# Altium PCB mb997.PcbDoc (part 2 of 4)
Units mil, origin at the board's own origin, x right, y up, seen from the top; angles counter-clockwise.
Board outline 2598.43 x 3818.9 mil, 2 copper layers (Top, Bottom), stack 62.402 mil thick; 189 components, 183 nets, 746 pads, 491 vias.
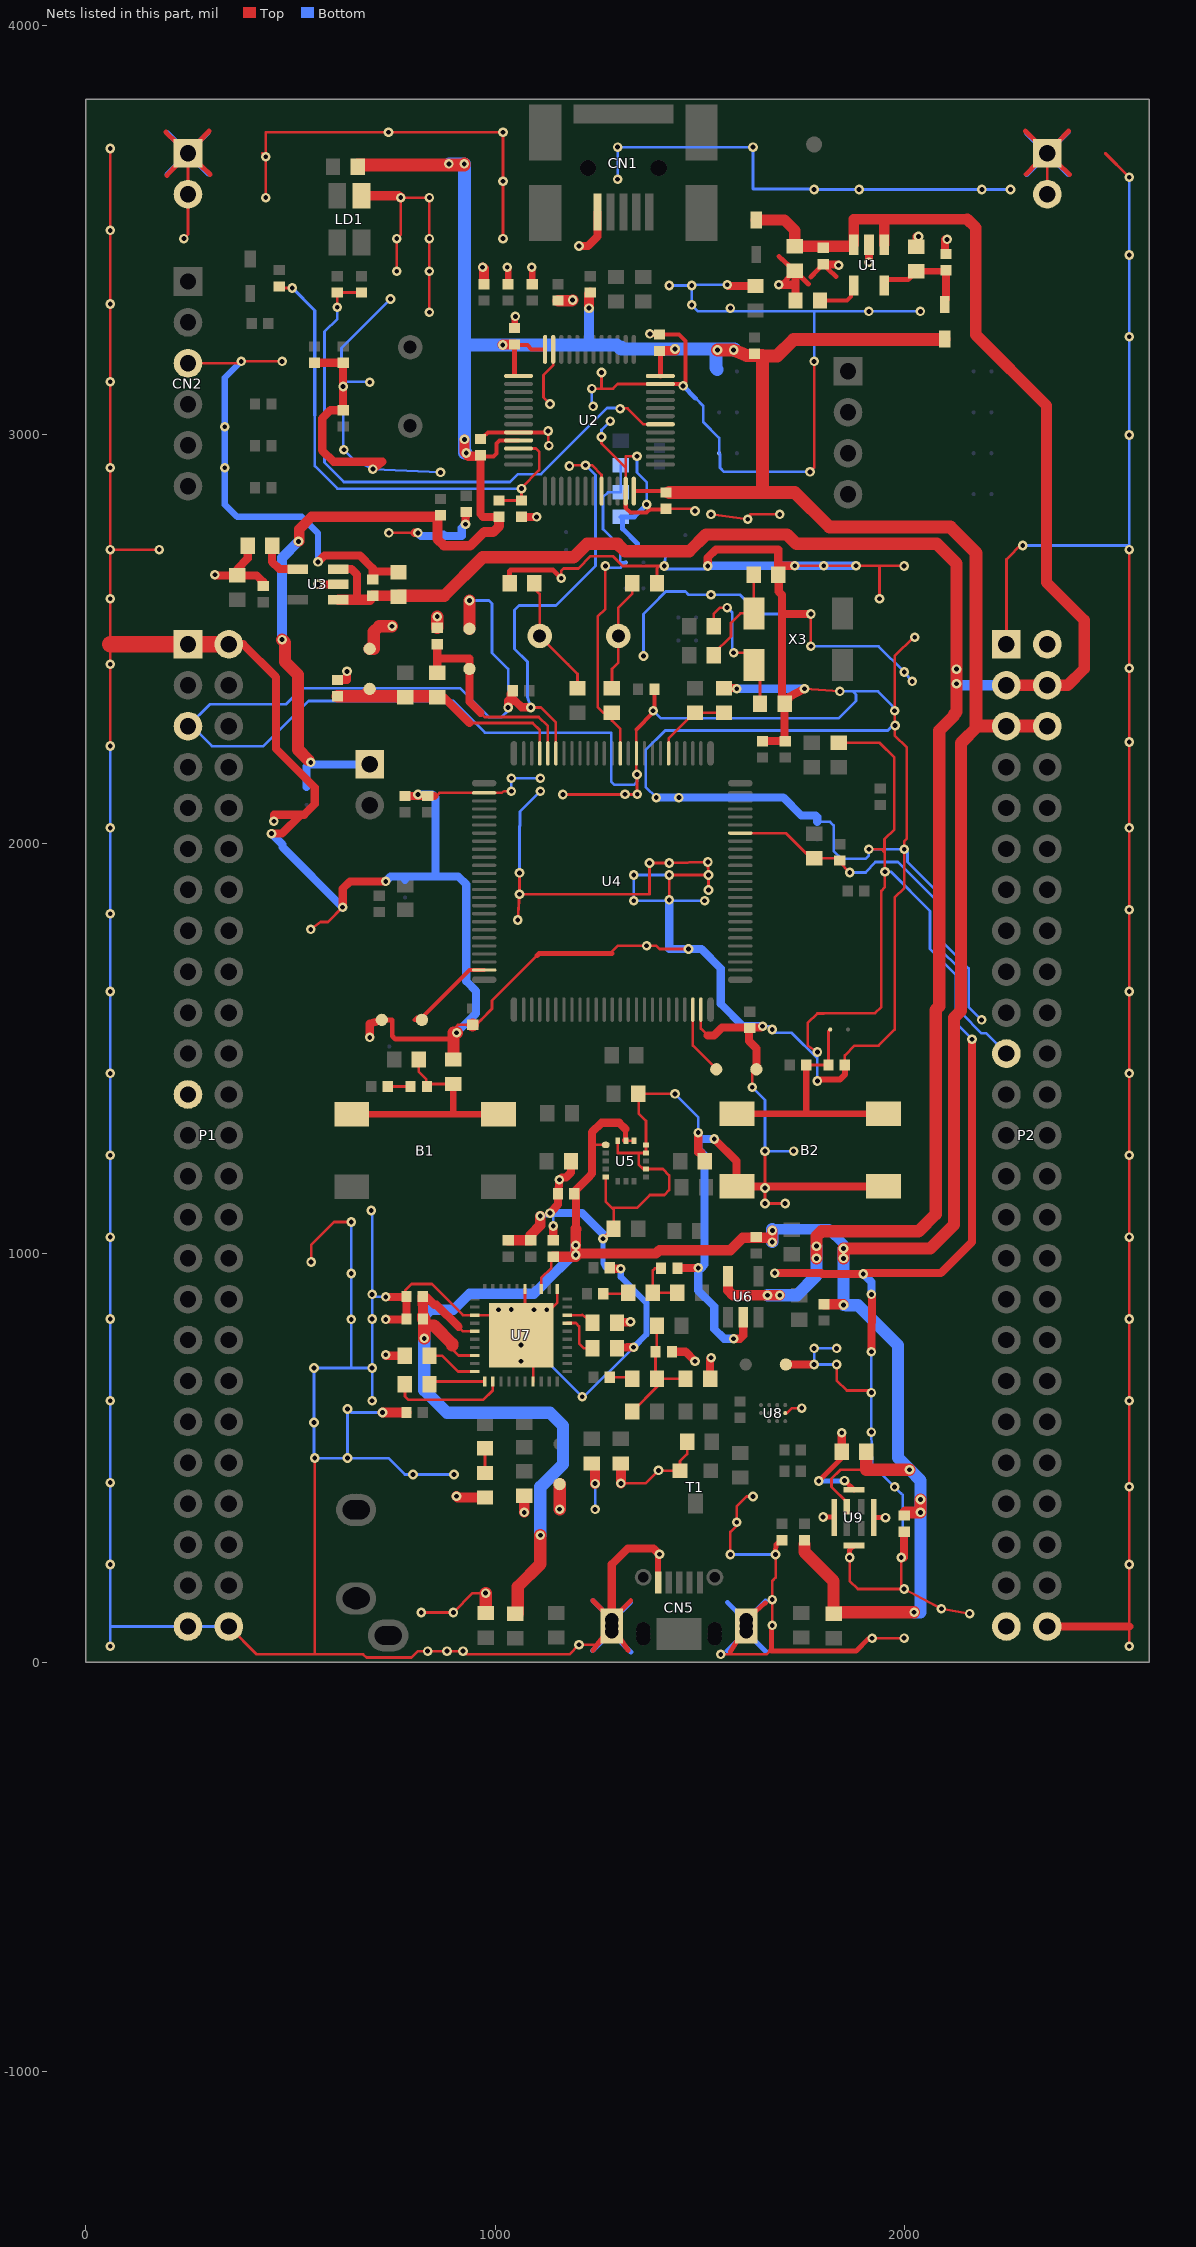
[diagram p2: the nets of this part, all layers, seen from the top]

## Via types
v1: diameter 23.62, hole 11.81, Top to Bottom, 484 vias
v2: diameter 19.68, hole 11.81, Top to Bottom, 7 vias

## Nets (pads, with @x,y where several pads share a name; then routed paths per layer and width w, separated by ;. In a path a pad name is that pad's centre, name@x,y a point inside that pad or via, vN(x,y) a via of type N, cw(c..) or ccw(c..) an arc to the next point about the centre after c; other vN are vias at no path point) (continued)
3V: C7.2 C8.2 C10.2 C12.1 C39.2 C42.2 C43.2 C45.2 C58.2 C60.2 D3.2 JP1.1 P2.5 P2.6 R1.2 R9.2 R14.2 R18.2 R19.1 R45.1 R51.1 R64.2 R66.2 R67.2 SB2.2 SB17.1 U2.1 U2.9 U2.24 U2.36 U2.48 U5.1 U5.14 U5.15 U7.5 U7.8 U7.33 U9.1 | length 13365.3
  Top w6.5: R1.2@663.82,3654.37 R1.2@663.82,3658.9 ; R18.2@858.9,2798.9 R18.2@859.08,2799.07 ; 895.17,773.9 895.17,764.69 910.17,749.69 U7.8@950.12,749.69 ; 910.25,819.94 921.45,808.74 U7.5@950.12,808.74 ; U2.1@1047.24,3147.3 1047.24,3144.93 1048.91,3143.27 U2.1@1057.11,3143.27 ; U7.33@1112.32,911.89 1112.32,938.9 1137.21,963.79 1137.21,990.79 1141.65,990.79 C42.2@1141.81,990.95 ; C39.2@1193.29,1144.74 1194.82,1144.74 1195.51,1145.43 C39.2@1196.2,1144.74 ; 1236.89,1264.17 U5.1@1270,1264.17 ; U5.15@1319.21,1274.02 U5.14@1338.9,1274.02 ; R14.2@1633.82,3197.36 1633.82,3196.98 1629.75,3192.91 R14.2@1637.62,3192.91 ; R64.2@1755.67,288.18 R64.2@1755.67,298.39 ; U9.1@1859,379.91 1859,391.42 1821.87,428.55 1821.87,448.54 1843.73,470.4 1906.71,470.4 ; C60.2@1999.21,358.9 2006.46,366.14 C60.2@2007.51,367.2
  Top w9.84: C10.2@963.81,2946.79 995.9,2946.79 1002.81,2953.7 1002.81,2977.99 1010.61,2985.79 U2.9@1057.11,2985.79 ; C7.2@1047.24,3220.16 1048.5,3218.9 1078.54,3218.9 1089.21,3208.23 U2.48@1122.07,3208.23 ; U2.24@1338.61,2861.77 1414.13,2861.77 C12.1@1417.32,2858.58
  Top w11.81: U2.1@1047.24,3147.3 C7.2@1047.24,3220.16 ; U5.15@1318.17,1275.06 1318.17,1303.15 ; C8.2@1403.26,3204.41 1403.57,3204.1 U2.36@1403.57,3143.26
  Top w15.75: U5.15@1318.17,1275.06 U5.15@1319.21,1274.02
  Top w20: C43.2@823.15,893.7 830.95,893.7 851.23,873.42 856.77,873.42 910.25,819.94 ; C10.2@963.81,2949.3 963.81,2946.79 963.81,2805.5 970.41,2798.9 R19.1@1002.81,2798.9 ; C39.2@1196.2,1144.73 C39.2@1197.76,1143.18 ; 1197.76,1058.17 C39.2@1197.76,1143.18 ; 1318.17,1303.15 1303.15,1318.17 1259.84,1318.17 1236.89,1295.22 1236.89,1264.17 1236.89,1194.11 1227.68,1184.9 1227.68,1184.35 1197.76,1154.43 C39.2@1197.76,1143.18
  Top w23.62: R18.2@858.9,2798.9 858.9,2744.09 874.65,2728.35 939.21,2728.35 972.83,2761.97 995.59,2761.97 1009.21,2775.59 R19.1@1009.21,2798.9 R19.1@1002.81,2798.9 ; R18.2@859.08,2799.07 R18.2@866.14,2802.83 ; v1(924.81,2988.19) 924.81,2956.54 934.57,2946.79 949.21,2946.79 ; C10.2@963.81,2946.79 949.21,2946.79 ; C10.2@963.81,2949.3 949.21,2946.79 ; v1(1229.21,3308.9) 1229.21,3343.94 R9.2@1232.24,3346.97 ; C8.2@1401.57,3204.41 1403.26,3204.41 1439.21,3204.41 v1(1439.21,3208.9) ; C12.1@1417.32,2858.58 C12.1@1425.2,2858.58
  Top w25: v1(519.21,2738.9) 521.18,2738.9 521.18,2768.9 551.18,2798.9 R18.2@858.9,2798.9 ; C43.2@823.15,893.7 C45.2@823.29,846.45 ; v1(1018.41,3218.9) 1018.41,3220.16 C7.2@1047.24,3220.16 ; C42.2@1141.81,990.95 1196.9,990.95 v1(1196.9,995.21) v1@1196.9,998.9 ; 1197.76,1058.17 1196.9,1059.02 v1(1196.9,1018.82) v1@1196.9,998.9 ; R45.1@1637.62,1038.82 R45.1@1637.62,1037.08 ; v1(1676.97,1026.69) v1@1676.97,1035.82 ; v1(1677.21,1054.9) 1677.21,1035.82 v1@1676.97,1035.82 ; R51.1@1803.21,874.9 1851.08,874.9 v1(1851.21,872.9) ; v1@1196.9,998.9 1393.21,998.9 1401.21,1006.9 1574.27,1006.9 1604.46,1037.08 R45.1@1637.62,1037.08 ; R45.1@1637.62,1037.08 1675.71,1037.08 v1@1676.97,1035.82
  Top w28: D3.2@2094.21,3232.28 2098.39,3232.28 D3.2@2098.39,3233.11
  Top w30: v1(479.21,2498.9) 486.21,2491.9 486.21,2444.9 518.02,2413.09 518.02,2230.03 v1@543.08,2204.97 ; C45.2@823.31,838.89 C45.2@824.01,839.6 ; C45.2@823.29,846.45 825.03,844.71 825.03,840.61 C45.2@824.01,839.6 ; v1(826.77,791.34) 826.77,822.83 ; 895.17,773.9 895.17,778.06 850.39,822.83 826.77,822.83 ; R66.2@1049.21,118.9 1055.12,118.9 1055.12,184.6 1110.33,239.81 v1(1110.33,310.52) ; R64.2@1755.67,288.18 1755.67,269.66 1826.77,198.56 1826.77,119.76 R67.2@1827.64,118.9 1830.79,122.05 v1(2023.62,122.05) ; v1(1851.21,986.9) v1(1851.21,1010.9) 2063.21,1010.9 2121.21,1068.9 2121.21,1574.9 2138.19,1591.88 2138.19,2246.42 2179.17,2287.4 ; C58.2@1906.71,514.12 1906.71,470.4 v1(2012.47,470.4) ; C60.2@2002.65,366.14 2006.46,366.14 v1(2039.37,366.14) v1(2039.37,397.64) ; 2175.21,2287.4 2179.17,2287.4 ; 2194.88,2287.4 2179.17,2287.4 ; C45.2@824.01,839.6 826.77,839.6 826.77,822.83
  Top w31.5: R1.2@663.82,3658.9 924.21,3658.9 v1(924.21,3661.4) ; C12.1@1425.2,2858.58 1653.54,2858.58 ; v1(1543.18,3206.68) v1(1582.53,3206.68) 1614.17,3192.91 R14.2@1629.75,3192.91 ; R14.2@1637.62,3192.91 1653.54,3192.91 1653.54,3192.28 ; D3.2@2094.21,3232.28 1729.21,3232.28 1689.21,3192.28 1653.54,3192.28 ; 2175.21,2287.4 2175.21,2710.87 2112.25,2773.83 1816.82,2773.83 1732.06,2858.58 1653.54,2858.58 ; 2194.88,2287.4 P2.5@2249.21,2287.4 P2.6@2349.21,2287.4 ; 1653.54,2858.58 1653.54,3192.28
  Bottom w6.5: v1@826.77,790.59 v1(826.77,791.34) v1@826.77,798.46 ; 1542.65,3158.92 SB2.2@1547.2,3154.37 ; v1(1851.21,872.9) 1856.53,872.9 v1@1857.21,872.22
  Bottom w19.68: SB17.1@539.21,2138.58 539.21,2188.9 v1@546.88,2196.56 ; v1(549.21,2198.9) v1@546.88,2196.56 ; JP1.1@693.22,2194.23 549.21,2194.23 v1@546.88,2196.56
  Bottom w23.62: 1229.21,3218.9 v1(1229.21,3308.9) ; 1314.81,3208.9 v1(1439.21,3208.9)
  Bottom w25: v1(479.21,2498.9) 479.21,2698.9 v1(519.21,2738.9) ; 826.77,822.07 826.77,845.44 842.75,861.42 898.08,861.42 937.19,900.53 1094.59,900.53 1118.2,924.38 1190.23,995.21 v1(1196.9,995.21) v1(1196.9,1018.82) ; v1@1676.97,1058.17 v1@1677.21,1058.17 ; v1(1851.21,1010.9) 1851.21,1022.17 1815.21,1058.17 v1@1680.48,1058.17 ; v1@1677.21,1058.17 v1@1680.48,1058.17 ; v1@1677.21,1058.17 v1(1677.21,1054.9) v1@1680.48,1058.17
  Bottom w30: v1@826.77,790.59 826.77,664.91 882.1,609.58 1133.94,609.58 1165.42,578.1 1165.42,483.66 1110.33,428.57 v1(1110.33,310.52) ; v1@826.77,798.46 826.77,822.07 ; v1(1676.97,1026.69) v1@1676.97,1058.17 ; v1(1851.21,872.9) v1(1851.21,986.9) v1(1851.21,1010.9) ; v1@1857.21,872.22 1886.53,872.22 1984.09,774.66 1984.09,499.59 2012.87,470.8 2039.37,444.31 v1(2039.37,397.64) v1(2039.37,366.14) 2039.37,122.05 v1(2023.62,122.05)
  Bottom w31.5: v1(886.71,3661.4) v1(924.21,3661.4) 924.81,3661.4 924.81,3218.9 ; v1(929.32,2954.84) 924.81,2954.84 v1(924.81,2988.19) 924.81,3218.9 ; 1314.81,3208.9 1314.58,3208.66 ; 1542.65,3158.92 1539.21,3162.36 v1@1539.21,3208.66 ; v1(1543.18,3206.68) v1@1541.2,3208.66 ; 924.81,3218.9 v1(1018.41,3218.9) 1229.21,3218.9 1297.01,3218.9 1302.01,3213.9 ; 1302.01,3213.9 1307.38,3213.9 1312.38,3208.9 1312.61,3208.66 ; 1302.01,3213.9 1307.01,3208.9 1307.25,3208.66 1312.61,3208.66 ; 1312.61,3208.66 1314.58,3208.66 ; 1314.58,3208.66 v1@1539.21,3208.66 ; v1@1539.21,3208.66 v1@1541.2,3208.66 ; v1@1541.2,3208.66 v1@1582.53,3208.66 ; v1@1582.53,3208.66 1584.52,3208.66 v1(1582.53,3206.68) v1@1582.53,3208.66
5V: C1.2 C2.2 C19.2 C20.2 D1.2 P2.3 P2.4 U1.1 U1.3 U3.1 U3.3 U6.5 | length 6369.8
  Top w6.5: C2.2@1801.71,3456.4 C2.2@1801.71,3459.96 ; 2153.21,3525.9 2153.6,3526.28
  Top w20: U3.3@616.93,2671.26 648.85,2671.26 662.21,2657.9 662.21,2596.46
  Top w25: U3.1@616.93,2596.46 662.21,2596.46 693.21,2596.46 693.21,2598.41 C19.2@700.79,2605.98 C20.2@761.65,2605.98 ; C20.2@763.78,2603.86 C20.2@761.65,2605.98 ; C20.2@765.21,2605.98 C20.2@761.65,2605.98 ; U6.5@1568.74,942.9 1568.74,908.9 1580.74,896.9 v1(1665.21,896.9) v1(1695.21,896.9) ; U1.3@1869.21,3459.96 1871.69,3459.96 U1.3@1875.95,3464.21 1875.95,3525.9 1950.75,3525.9 ; U1.1@1950.75,3464.21 1950.75,3525.9 ; 2153.21,3525.9 1950.75,3525.9
  Top w27.56: D1.2@1637.76,3524.45 1706.69,3524.45 1732.24,3498.9 C1.2@1732.24,3459.96 1801.71,3459.96 U1.3@1869.21,3459.96 ; 2153.6,3526.28 2174.21,3505.66 2174.21,3243.77 2347.08,3070.9 2347.08,2638.9 2439.21,2546.77 2439.21,2427.55 2399.07,2387.4 P2.4@2349.21,2387.4 P2.3@2249.21,2387.4
  Top w30: C20.2@765.21,2605.98 875.3,2605.98 969.21,2699.9 1191.21,2699.9 1224.21,2732.9 1299.21,2732.9 1317.21,2714.9 1474.13,2714.9 1515.21,2755.98 1713.21,2755.98 1736.3,2732.9 2079.21,2732.9 2127.21,2684.9 v1(2127.21,2426.9) v1(2127.21,2390.9) 2127.21,2322.34 2121.21,2316.34 2121.21,2312.9 2085.21,2276.9 2085.21,1602.9 2076.21,1593.9 2076.21,1094.9 2034.21,1052.9 1797.21,1052.9 1785.21,1040.9 v1(1785.21,1016.9) v1(1785.21,986.9)
  Bottom w25: v1(2127.21,2426.9) v1(2127.21,2390.9) 2133.21,2387.4 P2.3@2249.21,2387.4
  Bottom w30: v1(1665.21,896.9) v1(1695.21,896.9) 1737.21,896.9 1785.21,944.9 v1(1785.21,986.9) v1(1785.21,1016.9)
AIN_1: R2.2 R19.2 R20.2 U2.10 | length 1270.9
  Top w6.5: R19.2@1009.21,2838.9 R20.2@1064.09,2838.9 v1(1064.09,2867.9) 1064.09,2869.97 1107.21,2913.09 1107.21,2958.19 1099.3,2966.1 U2.10@1057.11,2966.1
  Top w7.87: R2.2@472.44,3361.89 476.06,3358.27 v1(503.94,3358.27) ; R20.2@1064.09,2838.9 R20.2@1070.87,2838.9
  Bottom w6.5: 559.06,3047.3 559.06,2923.36 614.51,2867.9 v1(1064.09,2867.9)
  Bottom w7.87: v1(503.94,3358.27) 559.06,3303.15 559.06,3047.3
BOOT0: P2.21 R30.2 R31.1 U4.94 | length 1029.1
  Top w6.5: U4.94@1598.96,2026.06 1709.93,2026.06 1771.29,1964.7 R30.2@1779.28,1964.7 1841.75,1964.7 1841.75,1958.89 R31.1@1842.24,1958.96 1842.24,1955.35 1840.76,1955.35 v1(1866.21,1929.9)
  Bottom w6.5: v1(1866.21,1929.9) 1905.2,1929.9 1928.81,1955.35 1983.9,1955.35 2078.34,1860.91 2078.34,1750.73 2141.3,1687.77 2141.3,1583.65 2187.62,1537.33 2199.28,1537.33 P2.21@2249.21,1487.4
GND: B2.1 B2.2 C1.1 C2.1 C3.2 C4.1 C5.1 C6.1 C7.1 C8.1 C9.1 C10.1 C11.1 C12.2 C13.1 C14.1 C15.1 C16.2 C17.2 C18.1 C19.1 C20.1 C21.1 C22.2 C23.2 C24.2 C25.1 C26.1 C27.2 C28.2 C29.1 C30.1 C31.1 C32.1 C33.2 C34.1 C35.2 C36.2 C37.1 C39.1 C40.1 C41.1 C42.1 C43.1 C45.1 C46.1 C47.2 C48.1 C49.2 C52.2 C53.1 C56.1 C57.1 C58.1 C59.2 C60.1 C61.2 CN1.5 CN2.3 CN5.0 CN5.5 JP2.1 JP2.2 JP3.1 JP3.2 LD1.1 LD2.2 LD3.2 LD4.2 LD5.2 LD6.2 P1.1 P1.2 P1.5 P1.23 P1.49 P1.50 P2.1 P2.2 P2.49 P2.50 R5.1 R6.1 R7.1 R8.2 R13.2 R20.1 R28.2 R39.1 R43.2 R44.2 R52.2 R57.1 R61.1 R62.1 R63.1 R65.2 SB6.2 SB10.1 SB18.1 SB19.1 T1.2 U1.2 U2.8 U2.20 U2.23 U2.35 U2.47 U3.2 U4.10 U4.20 U4.27 U4.74 U5.5 U5.10 U5.12 U5.13 U5.16 U6.2 U7.0 U7.3 U7.17 U7.31 U7.35 U8.D2 U9.5 | length 54564.7
  Top w6.5: v1(59.21,2238.9) v1(59.21,2438.9) 59.21,2487.4 v1(59.21,2598.9) v1(59.21,2718.9) ; v1(59.21,3698.9) v1(59.21,3498.9) v1(59.21,3318.9) v1(59.21,3128.9) v1(59.21,2918.9) v1(59.21,2718.9) ; v1(179.21,2718.9) v1(59.21,2718.9) ; v1(239.21,3478.9) 249.21,3488.9 JP2.2@249.21,3587.4 JP2.1@249.21,3687.4 ; CN2.3@249.21,3174.02 374.33,3174.02 v1(379.21,3178.9) v1(479.21,3178.9) ; P1.50@349.21,87.4 417.29,19.33 559.21,19.33 ; 430.71,3687.4 v1(439.21,3678.9) ; v1(439.21,3578.9) v1(439.21,3678.9) ; v1(549.21,1790.9) 573.21,1808.9 591.21,1808.9 v1(627.21,1844.9) ; v1(550.21,977.9) 550.21,1019.9 606.21,1075.9 v1(648.21,1075.9) ; v1(559.21,498.9) 559.21,19.33 ; v1(740.16,2759.84) v1@803.15,2759.84 ; v1(759.21,3398.9) v1(759.21,3478.9) 769.21,3488.9 v1(769.21,3578.9) v1(839.21,3578.9) v1(839.21,3478.9) v1(839.21,3398.9) v1(839.21,3298.9) ; C43.1@779.79,892.9 779.79,908.64 795.53,924.38 845.18,924.38 921.45,848.11 997.56,848.11 998.7,849.56 v1(1008.02,861.42) ; v1(819.14,121.64) v1(897.84,121.64) 945.06,168.86 v1(976.54,168.86) ; C32.1@834.88,2117.01 839.14,2112.75 846.76,2112.75 850.82,2116.81 856.28,2116.81 863.95,2124.48 1015.75,2124.48 1021.97,2128.78 1039.21,2128.78 v1(1039.5,2128.49) ; v1@897.84,1538.24 897.84,1546.22 909.21,1557.59 C34.1@945.06,1557.59 ; C34.1@944.36,1556.37 952.71,1556.37 965.24,1568.9 965.24,1569.83 992.28,1596.87 992.28,1616.94 1102.46,1727.12 ; C10.1@963.81,2989.3 966.06,2989.3 C10.1@970.65,2993.88 ; v1(1019.21,3478.9) v1(1019.21,3618.9) v1(1019.21,3738.9) v1(739.21,3738.9) 439.21,3738.9 v1(439.21,3678.9) ; v1(1055.24,1813.69) v1(1059.21,1876.65) ; v1(1059.21,1928.9) v1(1059.21,1876.65) ; v1(1062.99,775.59) 1062.99,735.62 v1(1063.11,735.5) ; U7.0@1063.11,798.9 1063.55,798.46 1069.03,798.46 1092.64,774.85 U7.17@1092.64,685.91 ; U7.35@1072.95,911.89 1072.95,861.42 v1(1094.59,861.42) ; v1(1086.72,2333.11) 1111.77,2333.11 1148.17,2296.71 U4.20@1148.17,2220.94 ; v1(1126.07,861.42) 1134.94,861.42 1134.94,861.84 1151.69,878.59 U7.31@1151.69,911.89 ; v1(1129.21,3008.9) 1129.21,2974.9 v1(1131.21,2972.9) ; v1(1133.86,3074.8) 1118.13,3090.53 1118.13,3145.67 1141.76,3169.29 U2.47@1141.76,3208.23 ; v1(1156.71,1178.9) v1@1157.55,1178.9 ; v1(1161.21,2648.9) 1161.21,2666.9 1167.21,2672.9 1203.21,2672.9 1233.21,2702.9 1287.21,2702.9 1311.21,2678.9 1401.21,2678.9 ; v1(1165.42,2120.62) v1@1317.21,2120.62 ; v1(1181.16,2923.36) 1183,2925.2 v1(1220.47,2925.2) 1236.24,2925.2 1259.87,2901.57 U2.20@1259.87,2861.77 ; v1(1236.25,3112.24) 1259.86,3112.24 ; v1(1259.86,2994.19) 1259.86,2978.45 1318.92,2919.39 ; v1(1259.86,3151.59) 1259.86,3112.24 ; U5.5@1270,1185.43 1270,1125.98 1285.75,1110.24 ; CN5.0@1284.84,74.62 1253.16,42.94 1249.31,42.94 v1(1204.77,42.94) 1181.16,19.33 929.32,19.33 v1(921.45,27.2) v1(882.1,27.2) v1(834.88,27.2) 811.27,27.2 795.53,11.46 685.35,11.46 677.48,19.33 559.21,19.33 ; 1285.2,1731.91 1285.2,1736.71 1299.21,1750.73 v1(1370.04,1750.73) 1393.65,1750.73 1401.52,1742.86 v1(1472.35,1742.86) ; LD6.2@1289.21,1058.9 1289.68,1059.37 1289.68,1106.3 1285.75,1110.24 ; U5.16@1299.53,1274.02 1299.53,1244.49 1350.39,1244.49 ; v1(1307.09,437.01) 1367.32,437.01 v1(1399.21,468.9) 1400.21,467.9 T1.2@1451.71,467.9 1451.71,491.4 1469.21,508.9 R57.1@1469.21,538.9 ; v1(1317.21,2120.9) v1@1317.21,2120.62 ; U2.23@1318.92,2861.77 1318.92,2919.39 ; 1345.02,2279.53 1345.02,2168.14 1345.16,2168 v1@1346.46,2166.7 ; v1(1346.46,2169.29) v1@1346.46,2166.7 ; v1(1346.43,2946.97) 1318.92,2946.97 1318.92,2919.39 ; v1(1347.21,2120.9) v1@1346.46,2120.62 ; C15.1@1395.21,2636.9 1395.21,2672.9 1401.21,2678.9 ; U2.35@1403.57,3123.58 1299.21,3123.58 1287.87,3112.24 1259.86,3112.24 ; v1(1413.21,2678.9) 1401.21,2678.9 ; C12.2@1417.32,2818.58 1478.92,2818.58 1483.39,2814.11 v1(1488.09,2813.18) ; v1(1425.21,1862.9) 1425.13,1862.98 v1(1425.13,1923.87) v1(1521.21,1923.87) ; v1(1439.21,1388.9) LD3.2@1349.21,1388.9 1350.39,1387.72 1350.39,1340.87 1368.43,1322.83 U5.13@1368.43,1264.17 U5.12@1368.43,1244.49 1350.39,1244.49 ; U4.74@1502.5,1594.96 1502.5,1548.57 1519.57,1531.5 ; v1(1521.21,1886.9) v1(1521.21,1923.87) ; v1(1527.21,2804.9) v1(1617.21,2792.9) 1623.03,2792.9 1623.03,2804.9 v1(1695.21,2804.9) ; v1(1551.05,19.33) 1662.92,19.33 1672.62,29.04 ; v1(1574.66,263.3) 1574.66,318.39 1590.4,334.13 v1(1590.4,342) 1590.4,381.35 1614.01,404.96 v1(1629.75,404.96) ; v1(1628.21,1404.9) 1628.21,1443.9 C36.2@1638.21,1453.9 ; v1(1659.21,1248.9) 1659.21,1162.71 v1(1659.21,1158.9) v1(1659.21,1121.13) v1(1708.45,1121.13) ; v1(1676.97,90.16) v1(1676.97,153.12) 1676.97,198.9 1685.29,207.21 v1@1685.29,272.1 ; U8.D2@1708.74,608.9 1713.21,608.9 1725.21,620.9 v1(1749.21,620.9) ; v1(1732.06,2679.39) v1(1802.89,2679.39) v1(1881.59,2679.39) 1939.21,2679.39 ; v1(1755.67,2378.9) v1(1842.24,2372.46) ; v1(1769.21,2908.9) 1779.21,2918.9 v1(1779.21,3178.9) ; v1(1771.41,2482.64) v1(1771.41,2561.34) ; v1(1787.15,1491.02) 1763.54,1506.76 1763.54,1561.85 1787.15,1585.46 1802.89,1585.46 1803.48,1586.04 1928.23,1586.04 1943.39,1601.2 1943.39,1885.1 1951.84,1893.55 v1@1951.84,1939.02 ; U9.5@1826.97,354.85 U9.5@1828.48,353.34 ; v1(1834.37,727.63) 1834.37,688.9 1859.21,664.06 1919.21,664.06 v1(1919.21,658.9) ; R28.2@1839.21,2246.9 1939.33,2246.9 1975.33,2210.9 1975.33,2035.14 1951.33,2011.14 1951.33,1978.88 ; C58.1@1846.71,499.1 C58.1@1846.71,514.12 ; v1(1853.55,443.85) v1@1854.11,443.85 ; C37.1@1854.37,1459.54 1854.37,1483.15 1877.98,1506.76 1936.68,1506.76 1976.03,1546.11 1976.03,1868.78 1999.64,1892.39 v1(1999.64,1986.83) 1999.64,2006.51 2006.03,2012.9 2006.03,2234.9 1976.03,2264.9 v1(1976.03,2325.24) 1976.03,2459.03 2023.25,2504.9 v1(2025.21,2504.9) ; v1(1866.14,255.91) 1866.14,198.9 1886.14,178.9 v1(1999.21,178.9) ; v1(1913.07,1986.83) 1943.39,1986.83 1951.33,1978.88 ; v1(1920.94,58.68) 1998.99,58.68 v1(1999.21,58.9) ; v1(1939.21,2598.9) 1939.21,2679.39 ; v1(1952.42,1931.74) v1@1951.84,1939.02 ; v1(1992.13,255.91) 1992.13,185.98 v1(1999.21,178.9) ; v1(1999.21,2678.9) 1998.72,2679.39 1939.21,2679.39 ; v1(2159.21,118.9) v1(2090.21,130.9) v1(1999.21,178.9) ; P2.1@2249.21,2487.4 2249.21,2695.13 2288.56,2734.48 2289.21,2733.83 v1(2289.21,2728.9) ; JP3.2@2349.21,3587.4 JP3.1@2349.21,3687.4 ; 2490.71,3687.4 v1(2549.21,3628.9) ; v1(2549.21,38.9) 2549.21,87.4 v1(2549.21,238.9) v1(2549.21,428.9) v1(2549.21,638.9) v1(2549.21,838.9) v1(2549.21,1038.9) v1(2549.21,1238.9) v1(2549.21,1438.9) v1(2549.21,1638.9) v1(2549.21,1838.9) v1(2549.21,2038.9) v1(2549.21,2248.9) v1(2549.21,2428.9) v1(2549.21,2718.9) ; v1(1059.21,1876.65) 1377.21,1876.65 v1(1377.21,1952.9) v1(1425.13,1952.9) v1(1519.57,1955.35) v1(1521.21,1923.87) ; 1285.75,1110.24 1346.46,1110.24 1377.95,1141.73 1413.39,1141.73 1425.2,1153.54 1425.2,1189.37 1409.45,1205.12 U5.10@1368.43,1205.12 1368.03,1204.72 1362.2,1204.72 1350.39,1216.54 1350.39,1244.49 ; v1@1317.21,2120.62 v1@1346.46,2120.62 ; v1@1346.46,2120.62 v1@1346.46,2166.7 ; 1951.33,1978.88 1951.84,1978.37 v1@1951.84,1939.02
  Top w9.84: C10.1@970.65,2993.88 982.24,3005.47 1125.79,3005.47 v1(1129.21,3008.9) ; C8.1@1401.57,3244.41 1449.21,3244.41 1464.72,3228.9 1464.72,3128.9 v1@1459.21,3123.39 ; U2.35@1403.57,3123.58 1403.76,3123.39 v1@1459.21,3123.39 ; v1(1459.21,3118.9) v1@1459.21,3123.39
  Top w10: U2.23@1318.92,2861.77 1318.92,2821.05 1330.69,2809.28 1370.04,2809.28 1377.91,2817.15 1415.89,2817.15 C12.2@1417.32,2818.58 ; 1345.02,2279.53 1385.78,2320.29 v1(1385.78,2325.24) 1389.21,2323.72 C24.2@1389.21,2374.02
  Top w12: C33.2@722.92,1569.72 748.31,1569.72 748.31,1530.37 756.18,1522.5 889.97,1522.5 897.84,1530.37 v1(905.71,1538.24) ; C14.1@1035.21,2636.9 1035.21,2666.9 1037.62,2669.31 1140.8,2669.31 v1(1161.21,2648.9) ; 1102.46,1727.12 1107.26,1731.91 1285.2,1731.91 ; v1(1263.21,1034.9) v1@1264.21,1033.9 ; LD6.2@1289.21,1058.9 v1@1264.21,1033.9 ; 1672.62,29.04 1675,27.2 ; v1(1676.97,90.16) 1675,88.19 1675,27.2 ; v1(1684.84,263.3) 1685.29,272.1 1686.03,286.85 1686.03,287.42 1699.77,301.16 R63.1@1700.58,298.39 ; v1(1790.55,442.94) 1846.71,499.1 C58.1@1846.71,514.12 ; v1(1801.37,354.85) U9.5@1826.97,354.85 ; v1@1854.11,443.85 U9.5@1876.71,421.25 ; v1(1866.14,255.91) 1866.14,274.85 U9.5@1876.71,285.43 ; v1(1920.94,58.68) 1913.07,58.68 1881.59,27.2 1675,27.2 ; U9.5@1924.94,353.34 v1(1953.66,353.34) ; v1@1264.21,1033.9 1263.21,1032.9 1265.21,1032.9 v1@1264.21,1033.9
  Top w12.01: 195.32,3739 JP2.1@249.21,3687.4 ; 197.61,3633.51 JP2.1@249.21,3687.4 ; 300.81,3741.29 JP2.1@249.21,3687.4 ; 303.1,3635.8 JP2.1@249.21,3687.4 ; 1238.39,28.9 1249.31,42.94 1278.07,79.89 CN5.0@1284.84,88.6 1291.32,78.98 1325,29 ; 1238.39,150.79 CN5.0@1284.84,103.76 1331.29,150.52 ; 1574.64,26.4 1607.29,78.55 CN5.0@1613.58,88.6 ; CN5.0@1613.58,103.76 1660.03,145.2 ; 1693.35,3435.66 C1.1@1732.24,3399.96 1720.07,3387.46 v1@1701.67,3368.57 ; C1.1@1733.74,3398.46 1746.24,3386.29 1765.13,3367.89 ; 1771.13,3385.01 1789.54,3403.9 C2.1@1801.71,3416.4 1814.21,3404.22 1833.1,3385.82 ; 2295.11,3741.6 2349,3690 2347.8,3688.75 2297.4,3636.11 ; 2400.81,3741.29 JP3.1@2349.21,3687.4 2403.1,3635.8
  Top w15: CN5.5@1398.03,194.9 1398.03,260.24 v1(1401.57,263.78) ; v1(1787.15,1420.19) 1790.76,1423.8 1842.24,1423.8 1854.37,1435.93 C37.1@1854.37,1459.54
  Top w15.75: v1(1029.21,3408.9) 1031.46,3406.65 R6.1@1031.46,3367.28 ; C7.1@1047.24,3260.16 1047.24,3286.93 v1(1049.21,3288.9) ; v1(1089.21,3408.9) 1090.51,3407.6 R7.1@1090.51,3367.28 ; v1(1377.91,3246.03) 1393.65,3244.41 C8.1@1401.57,3244.41
  Top w19.68: R20.1@1064.09,2798.9 v1(1101.21,2798.9) ; v1(1535.31,1278.53) 1589.21,1224.63 1589.21,1164.03 B2.2@1590.53,1162.71 1659.21,1162.71 B2.1@1948.8,1162.71 ; v1(1919.21,758.9) 1920.94,897.17 v1(1919.21,898.9)
  Top w20: v1(314.96,2657.48) 316.46,2655.98 C17.2@370.08,2655.98 ; P1.2@349.21,2487.4 384.35,2487.4 464.57,2407.18 464.57,2232.28 559.06,2137.8 559.06,2096.9 533.13,2070.98 525.21,2070.98 ; C13.1@395.2,2728.35 395.2,2696.85 370.08,2671.73 C17.2@370.08,2655.98 ; C18.1@433.07,2630.24 433.07,2640.24 417.32,2655.98 C17.2@370.08,2655.98 ; v1(453.21,2024.9) 479.13,2024.9 525.21,2070.98 ; v1(459.21,2054.9) 459.21,2070.98 525.21,2070.98 ; R13.2@558.21,3175.5 C6.1@628.41,3175.5 v1(628.41,3117.5) C9.1@628.41,3059.5 597.21,3059.5 577.21,3039.5 577.21,2961.5 605.01,2933.7 724.7,2933.7 v1(701.09,2915.49) ; v1(566.93,2633.86) U3.2@616.93,2633.86 ; v1(566.93,2688.98) 582.68,2704.72 669.29,2704.72 700.79,2673.23 700.79,2665.35 ; C25.1@614.52,2400.33 637.8,2400.33 v1(637.8,2421.26) ; v1(627.21,1844.9) 627.21,1890.13 645.21,1908.13 v1(732.57,1908.13) ; v1(693.21,1526.9) 693.21,1560.07 C33.2@722.92,1569.72 ; C19.1@700.79,2645.98 700.79,2665.35 ; v1(732.57,751.24) 732.57,748.9 C47.2@779.21,748.9 ; v1(732.57,837.81) 783.31,837.81 C45.1@783.31,838.89 783.31,893.54 C43.1@783.15,893.7 783.15,892.9 779.79,892.9 v1(732.57,892.9) ; C20.1@763.78,2663.86 762.28,2665.35 700.79,2665.35 ; C31.1@779.79,2117.01 v1@811.27,2117.01 ; v1@803.15,2759.84 803.27,2759.72 811.14,2759.72 v1(811.02,2759.84) ; v1(811.27,2120.62) v1@811.27,2117.01 ; 850.82,2116.81 850.62,2117.01 C32.1@834.88,2117.01 v1@811.27,2117.01 ; v1(927.21,2780.9) 927.21,2790.94 C11.1@929.13,2810.71 ; v1(1031.63,2333.11) 1031.63,2349.61 1048.14,2349.61 ; C26.1@1042.99,2374.02 1037.29,2366.21 1037.29,2360.47 1048.14,2349.61 ; v1(1086.72,2333.11) 1085.96,2333.87 1063.88,2333.87 1048.14,2349.61 ; v1(1133.94,1097.52) 1144.77,1108.34 1144.77,1110.18 1153.29,1118.7 C39.1@1153.29,1144.74 1157.54,1178.79 v1@1157.55,1178.9 ; C42.1@1141.81,1030.95 v1(1141.81,1066.04) ; v1(1156.71,1178.9) 1162.71,1184.9 1173.21,1184.9 1185.21,1196.9 LD4.2@1185.21,1223.9 ; v1(1204.72,3460.63) 1226.61,3460.63 1250.23,3484.25 CN1.5@1250.23,3543.35 ; R43.2@1279.86,963.73 1279.86,961.4 v1(1306.71,961.4) ; CN5.0@1284.84,88.6 CN5.0@1284.84,103.76 1284.84,239.3 1323.84,278.3 1387.06,278.3 v1(1401.57,263.78) ; C48.1@1297.73,766.98 1322.61,769.7 v1(1338.21,769.7) ; C46.1@1297.73,829.94 1314.4,831.04 1329.21,831.04 v1(1330.41,832.1) ; C24.2@1389.21,2374.02 C24.2@1389.21,2377.9 ; R52.2@1431.71,758.9 1464.69,758.9 v1(1488.09,735.5) ; R44.2@1445.2,962.6 1445.2,963.73 v1(1495.96,963.73) ; v1(1495.96,1294.27) 1495.96,1245.49 1503.83,1245.49 LD5.2@1512.21,1223.9 ; v1(1519.21,2678.9) 1519.21,2698.9 1539.21,2718.9 1691.42,2718.9 1691.42,2679.39 ; 1519.57,1531.5 1534.84,1531.5 1554.24,1550.9 C35.2@1620.21,1550.9 ; C52.2@1525.2,692.6 1525.2,741.73 v1(1527.56,744.09) ; C28.2@1559.06,2380.39 1588.72,2380.39 v1(1590.21,2378.9) ; v1(1566.93,3366.14) 1569.9,3363.17 LD2.2@1636.12,3363.17 ; v1(1582.53,790.59) 1598.27,790.59 1606.14,798.46 U6.2@1606.14,842.9 ; C35.2@1621.88,1549.72 1622.15,1549.45 1622.07,1549.72 1622.05,1549.77 C35.2@1621.71,1550.9 ; C36.2@1638.21,1448.9 1638.21,1453.9 1638.21,1499.9 1620.21,1517.9 C35.2@1620.21,1550.9 ; v1@1650.21,1550.9 C35.2@1621.71,1550.9 ; v1@1650.25,1550.86 v1(1653.36,1553.98) ; C29.1@1653.36,2250.8 C30.1@1708.45,2250.8 1706.64,2263.17 1706.64,2327.25 1700.79,2333.11 C27.2@1700.79,2336.14 ; v1(1683.21,950.9) 1797.21,950.9 1799.21,948.9 v1(1899.21,948.9) 1899.21,950.9 2088.91,950.9 2164.91,1026.9 v1(2164.91,1522.5) ; v1(1692.91,3366.14) 1733.74,3366.14 ; C49.2@1710.23,727.63 v1(1779.28,727.63) ; v1(1732.06,2679.39) 1691.42,2679.39 ; C1.1@1732.24,3399.96 1733.74,3398.46 1733.74,3366.14 ; C5.1@1733.74,3327.6 1733.74,3366.14 ; v1(1755.67,2378.9) 1716.54,2358.27 1716.54,2351.89 C27.2@1707.17,2342.52 C27.2@1700.79,2336.14 ; v1(1771.41,2561.34) 1700.79,2561.34 ; C2.1@1801.71,3416.4 1816.31,3415.42 1837.69,3415.42 v1(1839.21,3413.9) ; C58.1@1846.87,514.12 v1(1846.87,560.9) ; U1.2@1913.35,3464.21 1913.35,3421.3 v1(1913.39,3421.26) ; v1(1992.13,255.91) 1999.21,255.91 C60.1@1999.21,318.9 ; C3.2@2029.21,3458.9 2029.21,3483.9 v1(2034.21,3483.9) ; C4.1@2101.71,3441.4 2101.6,3443.93 2099.21,3446.31 2099.21,3476.9 v1(2104.21,3476.9) ; P2.50@2349.21,87.4 2549.21,87.4 ; C35.2@1620.21,1550.9 C35.2@1621.71,1550.9 ; 1691.42,2679.39 C16.2@1691.42,2657.48 1692.71,2656.19 1692.71,2616.43 1700.79,2608.35 1700.79,2561.34 ; C27.2@1700.79,2336.14 1700.79,2561.34
  Top w23.62: LD1.1@673.19,3583.5 764.61,3583.5 v1(769.21,3578.9) ; v1(969.21,3408.9) 972.4,3405.71 R5.1@972.4,3367.28
  Top w25: v1(724.41,610.24) C53.1@783.15,610.24 ; v1(905.51,405.51) 908.43,402.6 R61.1@975.2,402.6 ; C40.1@1031.63,1030.95 C41.1@1086.72,1030.95 1086.72,1044.05 1110.24,1067.56 v1(1110.24,1090.55) ; v1(1070.87,366.14) R62.1@1070.87,407.01 ; C56.1@1236.22,485.75 1244.12,485.75 v1(1244.12,436.44) ; v1(1307.09,437.01) C57.1@1307.09,485.75
  Top w27.56: R8.2@1153.5,3327.28 1187.6,3327.28 v1(1189.21,3328.9)
  Top w30: C22.2@693.22,2476.55 703.4,2476.55 703.4,2518.36 716.54,2531.5 v1(748.03,2531.5) ; C21.1@858.27,2527.87 v1(858.27,2555.12) ; R39.1@897.21,1472.9 897.21,1478.27 897.84,1478.9 897.84,1530.37 897.84,1538.24 v1(905.71,1538.24) ; C23.2@937.01,2525.38 v1(937.01,2594.49) ; C34.1@944.36,1556.37 C34.1@945.06,1557.59 ; R65.2@976.54,120.16 v1(976.54,168.86) ; v1(1157.48,374.02) C59.2@1157.48,435.25
  Top w40: 59.21,2487.4 P1.1@249.21,2487.4 P1.2@349.21,2487.4
  Bottom w6.5: v1(59.21,38.9) 59.21,87.4 ; v1(59.21,2238.9) v1(59.21,2038.9) v1(59.21,1828.9) v1(59.21,1638.9) v1(59.21,1438.9) v1(59.21,1238.9) v1(59.21,1038.9) v1(59.21,838.9) v1(59.21,638.9) v1(59.21,438.9) v1(59.21,238.9) 59.21,87.4 ; P1.50@349.21,87.4 P1.49@249.21,87.4 59.21,87.4 ; v1(648.21,1075.9) v1(648.21,949.9) v1(648.21,837.9) 648.21,718.9 ; v1(693.22,3127.98) 692.3,3128.9 624.21,3128.9 ; v1(697.21,1103.9) 699.21,1101.9 v1(699.21,898.9) ; v1(699.21,638.9) v1(699.21,718.9) ; v1(724.41,610.24) 647.87,610.24 v1(639.21,618.9) v1(639.21,498.9) ; v1(732.57,892.9) 705.21,892.9 v1(699.21,898.9) ; v1(744.21,3331.4) 624.21,3211.4 624.21,3128.9 ; v1(866.36,2907.62) v1(701.09,2915.49) 653.87,2939.1 v1(630.26,2962.71) 628.41,2964.56 v1(628.41,3117.5) 632.01,3121.1 624.21,3128.9 ; v1(899.21,458.9) v1(799.21,458.9) 779.21,458.9 739.21,498.9 v1(639.21,498.9) ; v1(937.01,2594.49) 984.25,2594.49 992.13,2586.61 992.13,2466.76 1031.5,2427.39 v1@1031.5,2340.98 ; v1(1031.63,2333.11) v1@1031.5,2340.98 ; v1(1039.37,862.2) 1039.37,852.2 1062.67,828.9 1062.67,798.9 v1(1212.64,648.93) 1217.44,648.93 v1(1338.21,769.7) ; v1(1039.5,2128.49) v1(1039.5,2159.97) v1(1110.33,2159.97) ; v1(1059.21,1928.9) 1059.21,2042.9 1060.74,2044.43 1060.74,2078.9 v1(1110.33,2128.49) ; v1(1086.72,2333.11) 1078.85,2358.27 1078.85,2444.84 1047.24,2476.45 1047.24,2570.87 1058.49,2582.12 1148.21,2582.12 1245.21,2679.12 1245.21,2901.16 1221.17,2925.2 v1(1220.47,2925.2) ; v1(1110.24,1090.55) 1126.98,1090.55 v1(1133.94,1097.52) ; v1(1141.81,1066.04) v1@1141.81,1097.52 ; v1(1236.25,3112.24) 1236.25,3071.86 v1(1239.21,3068.9) ; v1(1244.12,373.48) v1(1244.12,436.44) ; v1(1259.86,2994.19) 1259.86,3011.55 v1(1281.21,3032.9) ; v1(1299.21,3623.79) v1(1299.21,3702.49) v1(1629.75,3702.49) 1629.75,3600.18 1777.93,3600.18 v1(1779.21,3598.9) v1(1889.21,3598.9) v1(2189.21,3598.9) v1(2259.21,3598.9) ; v1(1346.46,2169.29) 1346.46,2152.1 1338.59,2144.23 1291.33,2144.23 1283.46,2152.1 1283.46,2271.65 975.04,2271.65 897.84,2348.85 543.69,2348.85 433.51,2238.67 307.59,2238.67 258.86,2287.4 P1.5@249.21,2287.4 302.79,2340.98 488.6,2340.98 527.95,2380.33 913.58,2380.33 984.41,2309.5 1015.89,2309.5 1031.5,2325.1 v1@1031.5,2340.98 ; v1(1346.43,2946.97) 1346.43,2907.23 1370.04,2883.62 v1(1370.04,2828.92) 1361.61,2820.48 ; 1347.61,2733.3 1354.3,2726.61 1401.52,2726.61 1417.26,2710.87 v1(1413.21,2678.9) 1419.21,2672.9 1419.21,2671.52 1511.83,2671.52 v1(1519.21,2678.9) v1@1519.57,2679.26 ; v1(1362.17,2459.03) 1362.17,2561.34 1401.52,2600.69 1401.52,2601.22 1416.73,2616.43 1464.48,2616.43 1472.35,2608.56 v1(1527.44,2608.56) 1598.27,2608.56 1645.49,2561.34 v1(1771.41,2561.34) ; v1(1385.78,2325.24) 1404.12,2306.9 1839.64,2306.9 1881.59,2348.85 1881.59,2364.59 1873.72,2372.46 ; v1(1393.65,2112.75) 1367.5,2138.9 1367.5,2228.9 1415.5,2276.9 1959.21,2276.9 1971.21,2288.9 v1(1977.21,2288.9) ; v1(1425.13,1923.87) v1(1338.56,1923.87) v1(1338.56,1860.91) 1425.21,1860.91 v1(1511.7,1860.91) ; v1(1425.13,3364.08) v1(1480.22,3364.08) ; v1(1439.21,1388.9) 1495.96,1332.15 v1(1495.96,1294.27) v1@1495.96,1292.52 ; 1489.3,3088.81 1508.36,3069.75 1508.36,3030.54 1547.2,2991.7 SB6.2@1547.2,2954.37 1549.21,2952.36 1549.21,2918.9 1559.21,2908.9 v1(1769.21,2908.9) ; v1(1566.93,3366.14) 1482.29,3366.14 v1(1480.22,3364.08) ; v1(1574.66,263.3) v1(1684.84,263.3) ; v1(1574.66,3308.99) v1@1574.66,3301.12 ; v1(1628.21,1404.9) 1659.21,1373.9 v1(1659.21,1248.9) v1(1729.21,1248.9) ; v1(1653.36,1553.98) 1669.1,1553.98 v1(1676.97,1546.11) 1676.97,1538.24 1724.19,1538.24 1787.15,1475.28 ; v1(1771.41,2482.64) 1936.68,2482.64 v1(1999.64,2419.68) v1(2019.21,2396.9) ; v1(1779.21,3178.9) 1779.21,3301.12 ; v1(1787.15,1420.19) 1787.15,1475.28 ; v1(1787.15,1491.02) 1787.15,1475.28 ; SB18.1@1787.15,2053.73 1818.63,2053.73 1827.21,2045.15 1827.21,1982.9 1846.89,1963.22 1905.2,1963.22 1913.07,1971.09 v1(1913.07,1986.83) v1(1999.64,1986.83) 2007.51,1978.96 2007.51,1955.35 2094.08,1868.78 2094.08,1758.6 2157.04,1695.64 2157.04,1601.2 v1(2188.52,1569.72) ; v1(1834.37,727.63) v1(1779.28,727.63) v1(1779.28,766.98) v1(1834.37,766.98) ; v1(1842.24,2372.46) 1873.72,2372.46 ; v1@1852.64,442.94 v1(1853.55,443.85) ; v1(1919.21,758.9) v1(1919.21,658.9) v1(1919.21,562.36) 1920.94,483.66 v1(1976.03,428.57) 1992.13,412.47 1996.21,408.39 1996.21,264.62 1992.13,260.54 v1(1992.13,255.91) ; v1(1952.42,1931.74) 1966.55,1931.74 2062.6,1835.69 2062.6,1742.86 2125.56,1679.9 2125.56,1561.85 v1(2164.91,1522.5) ; v1(1976.03,2325.24) 1972,2329.27 1972,2335.67 1935.21,2372.46 1873.72,2372.46 ; v1(2038.99,3301.12) v1(1913.07,3301.12) 1779.21,3301.12 ; v1(2289.21,2728.9) v1@2549.21,2728.9 ; v1(2549.21,2718.9) v1@2549.21,2728.9 ; v1(2549.21,3628.9) v1(2549.21,3438.9) v1(2549.21,3238.9) v1(2549.21,2998.9) v1@2549.21,2728.9 ; v1(639.21,498.9) v1(559.21,498.9) 557.21,500.9 v1(557.21,585.9) v1(557.21,718.9) 648.21,718.9 ; 648.21,718.9 v1(699.21,718.9) ; v1(699.21,718.9) v1(699.21,838.9) v1(699.21,898.9) ; v1(1480.22,3364.08) v1(1480.22,3316.86) 1495.96,3301.12 v1@1574.66,3301.12 ; v1@1574.66,3301.12 1779.21,3301.12
  Bottom w11.81: v1(1459.21,3118.9) 1489.3,3088.81
  Bottom w12: v1(1263.21,1034.9) 1263.21,974.9 1269.21,962.9 v1@1305.21,962.9 ; C61.2@1307.08,2798.92 C61.2@1311.21,2798.92 ; 1347.61,2733.3 1311.21,2769.7 C61.2@1311.21,2798.92 ; 1361.61,2820.48 1340.04,2798.92 C61.2@1311.21,2798.92 ; v1(1790.55,442.94) v1@1852.64,442.94
  Bottom w12.01: 197.4,3635.79 JP2.1@248,3687 ; 198,3738 JP2.1@248.8,3687.81 ; JP2.1@249.21,3687.4 JP2.1@248.8,3687.81 ; 298.6,3738.21 JP2.1@248.8,3687.81 ; 299.21,3636.4 248.41,3686.59 JP2.1@248,3687 ; 1237.81,28.17 CN5.0@1284.84,74.62 ; 1238.39,150.79 CN5.0@1284.84,103.76 ; CN5.0@1285,72 1331.45,24.97 ; CN5.0@1286,103 1331.29,146.68 ; 1566.55,28.17 CN5.0@1613.58,74.62 1660.03,27.58 ; 1567.13,146.68 1611.53,101.73 CN5.0@1613.58,99.64 ; CN5.0@1613.58,103.76 1660.62,150.21 ; 2297.79,3736.6 2348.41,3686.59 JP3.1@2349,3686 ; 2298.4,3634.79 JP3.1@2349,3686 ; JP3.1@2349.21,3687.4 2399.81,3738.61 ; 2400.21,3635.4 JP3.1@2349,3686 ; JP2.1@248,3687 JP2.1@248.8,3687.81
  Bottom w15: v1@1305.21,962.9 v1(1306.71,961.4) 1306.71,941.6 1369.41,878.9 1369.41,800.9 v1(1338.21,769.7)
  Bottom w15.75: v1(379.21,3178.9) 339.21,3138.9 v1(339.21,3018.9) v1(339.21,2918.9) 339.21,2828.9 369.21,2798.9 526.93,2798.9 566.93,2758.9 v1(566.93,2688.98)
  Bottom w19.68: v1(811.02,2759.84) 818.9,2751.97 874.02,2751.97 918.21,2751.97 918.21,2771.9 v1(927.21,2780.9) ; v1(1899.21,948.9) 1919.21,928.9 v1(1919.21,898.9)
  Bottom w20: v1(453.21,2024.9) 480.21,1997.9 480.21,1991.9 v1(627.21,1844.9) ; v1(732.57,1908.13) 744.38,1919.93 779.79,1919.93 ; SB19.1@779.79,1912.07 779.79,1919.93 ; v1(811.27,2120.62) 846.24,2120.62 854.11,2112.75 854.11,1919.93 ; SB10.1@874.02,2751.97 SB10.1@874.02,2755.91 ; v1(905.71,1538.24) 952.93,1585.46 952.93,1640.55 929.32,1664.16 929.32,1900.26 909.65,1919.93 854.11,1919.93 ; v1(1133.94,1097.52) 1141.81,1097.52 1212.59,1097.52 1263.21,1046.9 v1(1263.21,1034.9) ; v1(1393.65,2112.75) v1(1448.74,2112.75) 1703.94,2112.75 1747.8,2068.88 1783.19,2068.88 1786.72,2065.35 SB18.1@1787.15,2053.73 ; v1(1425.21,1862.9) 1425.21,1860.91 1425.21,1742.86 v1(1472.35,1742.86) 1503.83,1742.86 1551.05,1695.64 1551.05,1609.07 1606.14,1553.98 v1(1653.36,1553.98) ; v1@1495.96,1292.52 1495.96,1278.53 ; v1@1519.57,2679.26 1519.7,2679.39 v1(1732.06,2679.39) v1(1802.89,2679.39) v1(1881.59,2679.39) ; v1(1535.31,1278.53) 1495.96,1278.53 ; v1(1582.53,790.59) 1558.92,790.59 1535.31,814.2 1535.31,869.29 1495.96,908.64 1495.96,955.86 1503.83,963.73 1511.7,971.6 1511.7,1238.9 1495.96,1254.64 1495.96,1278.53 ; v1(1590.21,2378.9) v1(1755.67,2378.9) ; 779.79,1919.93 854.11,1919.93
LED_STLINK: R3.1 R4.1 U2.30 | length 1421.8
  Top w6.5: R4.1@673.19,3346.97 R3.1@614.13,3346.97 v1(614.17,3311.02) ; v1(1305.21,3062.9) 1306.43,3064.12 1323.21,3064.12 1362.17,3025.16 U2.30@1403.57,3025.16 ; v1(614.17,3311.02) v1(614.17,3311.02)
  Bottom w6.5: v1(614.17,3311.02) 614.17,3282.93 582.68,3251.44 582.68,2931.59 630.26,2884.01 1035.9,2884.01 1055.24,2903.35 1112.01,2903.35 1273.68,3065.02 1305.21,3065.02 v1(1305.21,3062.9)
MCO: C61.1 R25.1 R68.2 SB13.1 U4.12 | length 863.3
  Top w6.5: v1(1269.21,2678.9) 1269.21,2573.9 1250.21,2554.9 1250.21,2333.9 1264.21,2319.9 R25.1@1285.21,2319.9 1285.21,2300.9 1305.65,2280.46 U4.12@1305.65,2220.94
  Bottom w6.5: v1(1269.21,2678.9) 1273.52,2674.59 1306.21,2674.59 SB13.1@1318.88,2687.26 1305.21,2687.26 1305.21,2726.9 1263.21,2768.9 1263.21,2846.92 1275.21,2858.92 C61.1@1307.08,2858.92 R68.2@1307.08,2924.84
NetB1_1: B1.1 B1.2 C38.1 R35.2 R39.2 | length 573.8
  Top w6.5: R35.2@813.21,1472.9 813.21,1442.9 831.21,1424.9 831.21,1406.9 C38.1@833.21,1406.9 836.67,1407.76 841.81,1412.9 R39.2@897.21,1412.9
  Top w15.75: B1.1@649.62,1339.09 897.21,1339.09 ; R39.2@897.21,1412.9 897.21,1339.09 ; B1.2@1007.89,1339.09 897.21,1339.09
NetB2_3: B2.3 B2.4 C37.2 R37.1 SB1.2 | length 638.7
  Top w6.5: R37.1@1759.93,1459.54 C37.2@1810.76,1459.54 ; SB1.2@1818.62,1546.11 1814.37,1541.86 C37.2@1814.37,1459.54 ; C37.2@1810.76,1459.54 C37.2@1814.37,1459.54 ; C37.2@1810.76,1459.54 1812.57,1457.73 1810.76,1455.93 1810.76,1451.67 1813.54,1457.73 C37.2@1814.37,1459.54
  Top w15.75: B2.4@1590.53,1339.88 1759.93,1339.88 ; R37.1@1759.93,1459.54 1759.93,1339.88 ; B2.3@1948.8,1339.88 1759.93,1339.88
NetC3_1: C3.1 C4.2 D3.1 U1.5 | length 259.3
  Top w11.81: U1.5@1950.75,3364.21 1950.75,3378.9 2009.21,3378.9 C3.1@2029.21,3398.9
  Top w15.75: C3.1@2029.21,3398.9 C4.2@2101.64,3398.9
  Top w19.68: D3.1@2098.39,3317.36 2098.39,3328.07 2101.71,3331.4 2101.71,3383.91 2101.64,3398.9 C4.2@2101.71,3401.4
NetC5_2: C5.2 U1.4 | length 117.2
  Top w9.84: C5.2@1793.74,3327.6 1859.86,3327.6 1869.86,3337.6 1869.86,3367.23 1872.93,3367.23 U1.4@1875.95,3364.21
NetC13_2: C13.2 U3.4 | length 109.1
  Top w20: C13.2@455.2,2728.35 454.72,2727.87 454.72,2688.98 472.44,2671.26 U3.4@516.93,2671.26
NetC14_2: C14.2 R24.1 X2.1 | length 302.3
  Top w6.5: C14.2@1095.21,2636.9 1093.53,2635.22 1093.53,2625.89 1108.66,2610.76 X2.1@1108.66,2507.87 1178.31,2438.22 1201.21,2415.32 R24.1@1201.21,2379.9
NetC15_2: C15.2 R25.2 X2.2 | length 277.7
  Top w6.5: R25.2@1285.21,2379.9 1285.21,2427.32 1300.79,2442.9 X2.2@1300.79,2507.87 1300.79,2576.9 1335.21,2611.32 C15.2@1335.21,2636.9
NetC16_1: C16.1 R22.2 X3.4 | length 256.8
  Top w6.5: R22.2@1533.94,2460.63 1533.94,2465.04 1576,2507.11 1576,2539.78 1599.21,2562.99 X3.4@1631.89,2562.99 1631.89,2657.01 C16.1@1631.42,2657.48
NetC21_2: C21.2 C23.1 R23.1 U4.21 | length 543.2
  Top w6.5: 963.9,2320.19 974.31,2309.78 1106.1,2309.78 1128.48,2287.4 U4.21@1128.48,2220.94
  Top w20: C21.2@858.27,2487.87 858.27,2459.25 ; R23.1@858.49,2418.2 858.27,2418.42 858.27,2459.25 ; 963.9,2320.19 937.01,2347.08 C23.1@937.01,2427.38 937.01,2452.76 858.49,2452.76 858.49,2459.03 858.27,2459.25
NetC22_1: C22.1 C25.2 L1.2 R23.2 U4.22 | length 647.4
  Top w6.5: 937.01,2295.28 1091.54,2295.28 1108.8,2278.02 U4.22@1108.8,2220.94
  Top w20: C22.1@693.22,2366.46 C22.1@693.22,2378.55 ; L1.2@765.53,2358.2 L1.2@779.79,2358.2 ; R23.2@858.49,2358.2 859.97,2356.72 875.57,2356.72 937.01,2295.28
  Top w30: C25.2@614.52,2360.33 685.35,2360.33 ; C22.1@693.22,2366.46 685.35,2366.46 685.35,2360.33 ; L1.2@765.53,2358.2 L1.2@763.4,2360.33 ; L1.2@779.79,2358.2 777.66,2360.33 L1.2@763.4,2360.33 ; R23.2@858.49,2358.2 857.87,2358.35 855.4,2360.82 762.9,2360.82 L1.2@763.4,2360.33 ; 685.35,2360.33 L1.2@763.4,2360.33
NetC27_1: C27.1 R21.2 X3.1 | length 366
  Top w6.5: R21.2@1533.94,2531.5 1533.94,2561.34 1549.68,2577.08 v1(1566.79,2577.08) ; v1(1582.53,2466.9) 1631.89,2466.9 X3.1@1631.89,2437.01 1647.17,2421.73 C27.1@1647.17,2342.52
  Bottom w6.5: v1(1566.79,2577.08) 1579.21,2564.66 1579.21,2470.22 v1(1582.53,2466.9)
NetC28_1: C28.1 R26.2 U4.6 | length 197.8
  Top w6.5: U4.6@1423.76,2220.94 1423.76,2257.4 1486.75,2320.39 R26.2@1488.19,2320.39 C28.1@1559.06,2320.39
NetC33_1: C33.1 U4.49 | length 237.8
  Top w10: C33.1@820.92,1569.72 803.29,1569.55 809.19,1575.45 821.23,1575.45 937.19,1691.41 U4.49@972.97,1691.41
NetC36_1: C36.1 U4.73 | length 169.8
  Top w6.5: U4.73@1482.81,1594.96 1482.81,1506.76 1540.21,1449.36 C36.1@1540.21,1448.9
NetC38_2: C38.2 R38.1 | length 56
  Top w6.5: R38.1@737.21,1406.9 C38.2@793.21,1406.9
NetC44_1: C44.1 R47.1 | length 61.8
  Top w6.5: R47.1@1264.12,900.77 1319.94,900.77 1321.66,902.49 C44.1@1325.2,902.6
NetC44_2: C44.2 R44.1 R48.1 | length 136.9
  Top w6.5: R44.1@1405.2,962.6 1390.41,962.6 1385.2,957.38 C44.2@1385.2,902.6 R48.1@1445.2,902.6
NetC46_2: C46.2 U7.28 | length 68.2
  Top w6.5: U7.28@1176.1,848.11 1212.51,848.11 1213.06,848.65 C46.2@1237.73,829.94
NetC47_1: C47.1 U7.10 | length 126.9
  Top w6.5: C47.1@839.21,748.9 870.63,748.9 909.21,710.32 U7.10@950.12,710.32
NetC48_2: C48.2 U7.27 | length 112.4
  Top w6.5: U7.27@1176.1,828.43 1176.26,828.86 1197.25,828.86 1205.12,820.99 1205.12,778.57 1216.71,766.98 C48.2@1237.73,766.98
NetC50_1: C50.1 U7.12 | length 278.9
  Top w6.5: C50.1@779.21,678.9 779.53,678.58 779.53,649.19 787.66,641.06 970.6,641.06 994.21,664.67 U7.12@994.21,685.91
NetC50_2: C50.2 U7.11 | length 142.3
  Top w6.5: C50.2@839.21,678.9 839.21,685.91 U7.11@974.53,685.91
NetC51_1: C51.1 R53.1 | length 56.7
  Top w6.5: R53.1@1279.86,696.15 1319.71,696.15 1322.95,692.91 1330.45,692.91 C51.1@1335.2,692.6
NetC51_2: C51.2 C52.1 R49.2 R52.1 R54.1 | length 310.6
  Top w6.5: R54.1@1335.2,612.6 1395.83,673.23 C51.2@1395.83,692.6 ; R49.2@1395.13,822.07 1395.13,760.04 1394.88,759.79 R52.1@1391.71,758.9 1391.71,692.6 C51.2@1395.2,692.6 C51.2@1395.83,692.6 ; C52.1@1465.2,692.6 C51.2@1395.83,692.6
NetC54_1: C54.1 R61.2 | length 60
  Top w6.5: R61.2@975.2,462.6 C54.1@975.2,522.6